# Altium PCB PCB1_7841_AIO.PcbDoc
Units mil, origin at the board's own origin, x right, y up, seen from the top; angles counter-clockwise.
Board outline 2795.28 x 2007.87 mil, 2 copper layers (Top Layer, Bottom Layer); 3 components, 33 nets, 149 pads, 0 vias.
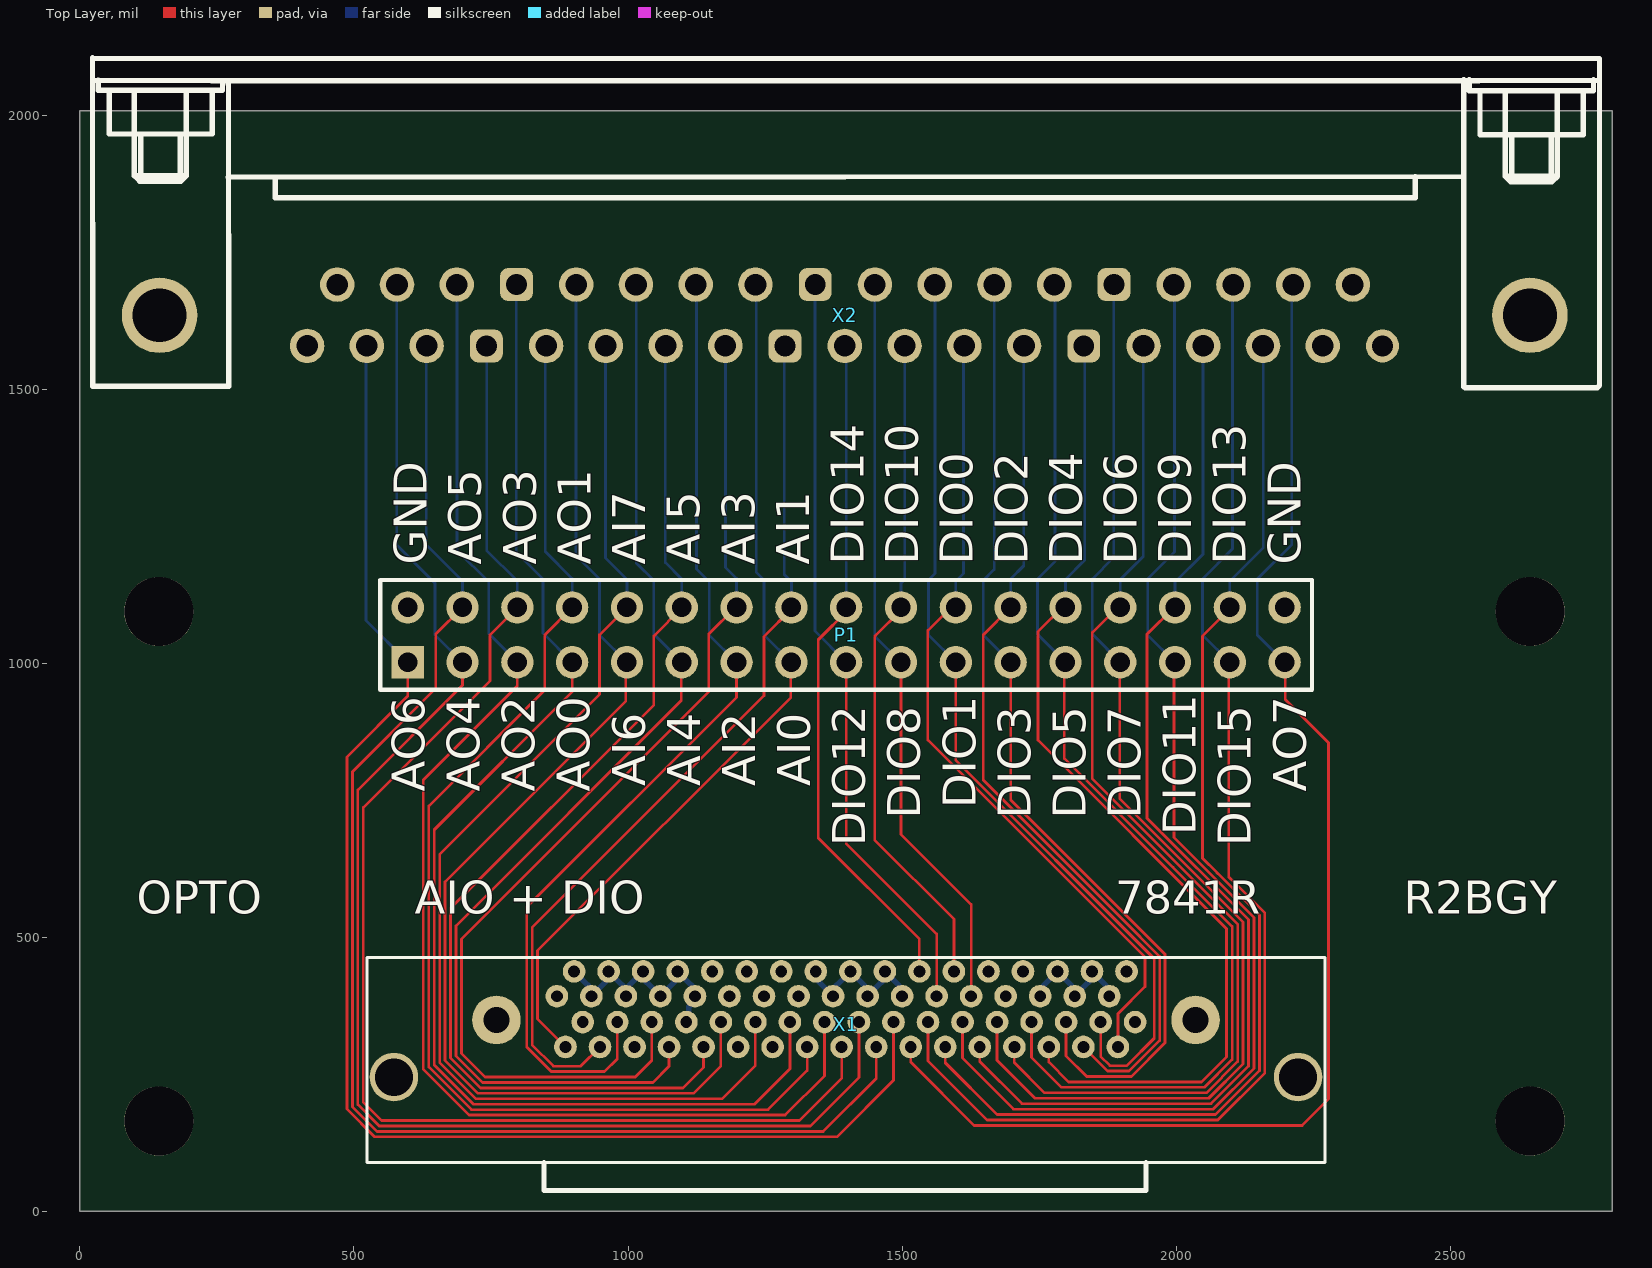
[diagram p0: Top Layer view]
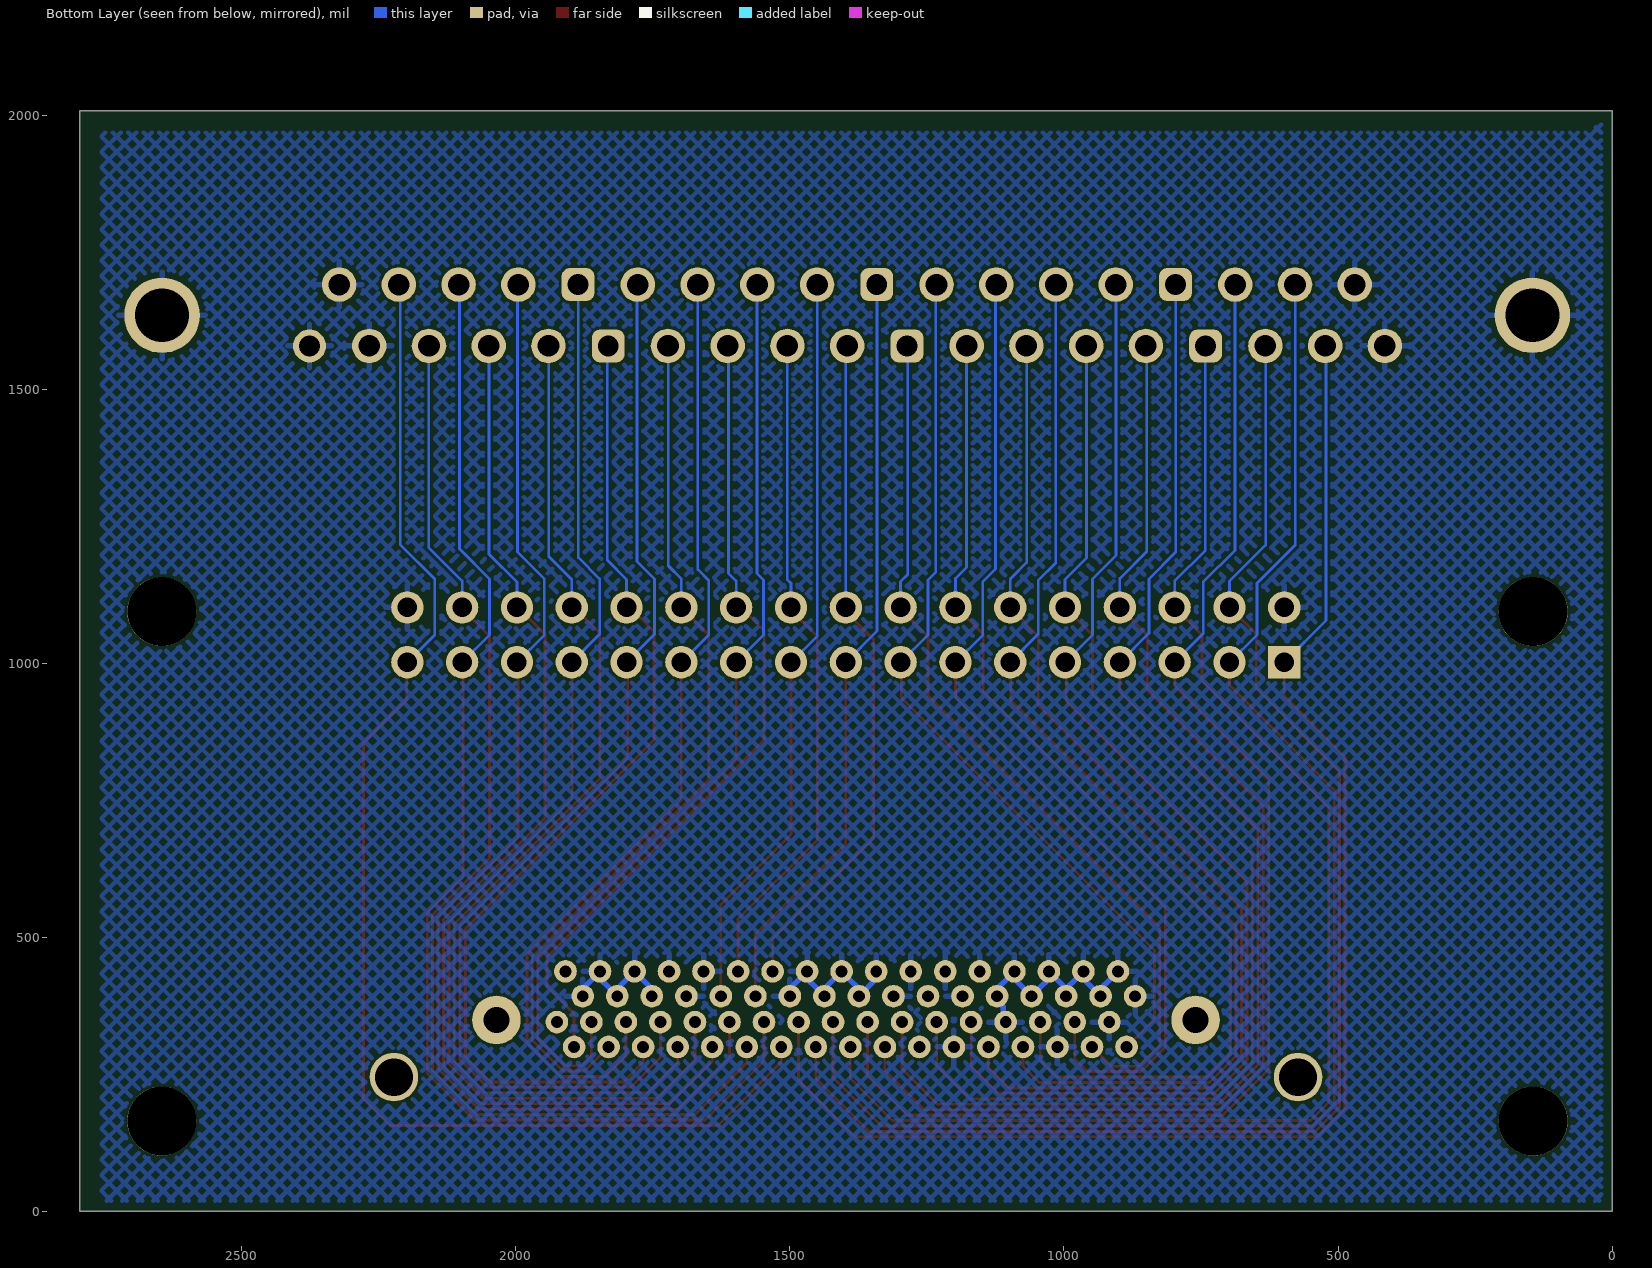
[diagram p1: Bottom Layer view, seen from below]

## Layer stack, top to bottom
Top Solder: solder mask 0.4, Solder Resist, Dk 3.5
Top Layer: signal copper 1.4
Dielectric 1: dielectric 12.6, FR-4, Dk 4.8
Bottom Layer: signal copper 1.4
Bottom Solder: solder mask 0.4, Solder Resist, Dk 3.5

## Board outline
0,0 0,2007.87 2795.28,2007.87 2795.28,0

## Design rules (kind name [scope] priority, off if disabled: settings)
Clearance [All] p1: gap=4.92 ignorepadtopadclearanceinfootprint=FALSE
PolygonConnect [All] p1: connectstyle=Relief reliefconductorwidth=10 reliefentries=4 polygonreliefangle="90 Angle" airgapwidth=10
RoutingVias [All] p1: holewidth=28 width=50 viastyle="Through Hole" minholewidth=28 minwidth=50 maxholewidth=28 maxwidth=50
SolderMaskExpansion [All] p1: expansion=4 istentingtop=FALSE
Width [All] p1: maxlimit=10 minlimit=4.92 preferedwidth=10
30 further rules are at their usual default settings.

## Components (designator, comment, footprint, x,y, rotation, side; value= is the part's Value field where it differs from the comment)
P1 "Header 17X2" HDR2X17 598,1002 r0 top
X1 "FPGA_connector" FPGA 572.83,245 r0 top
X2 "CHEAP_CON_37_MALE" CHEAP_CONN_MALE 2645.46,1635 r180 top

## Footprints (in the part's own frame and the unit in brackets; to place one, negate y for a bottom-side part, rotate by r counter-clockwise, add the part's x,y. Pads: shape width x height; smd on the part's side, far side on the other; paste and mask are expansions set on the pad)
CHEAP_CONN_MALE [mm] "CHEAP_CONN_MALE"
  round 1.524 hole 0.965: 1(6.833,1.422)
  round 1.6 hole 1: 2(9.601,1.422) 3(12.37,1.422) 4(15.138,1.422) 5(17.907,1.422) 7(23.444,1.422) 8(26.213,1.422) 9(28.981,1.422) 10(31.75,1.422) 12(37.287,1.422) 13(40.056,1.422) 14(42.824,1.422) 15(45.593,1.422) 17(51.13,1.422) 18(53.899,1.422) 19(56.667,1.422) 20(8.204,-1.422) 21(10.973,-1.422) 22(13.741,-1.422) 23(16.51,-1.422) 25(22.047,-1.422) 26(24.816,-1.422) 27(27.584,-1.422) 28(30.353,-1.422) 30(35.89,-1.422) 31(38.659,-1.422) 32(41.427,-1.422) 33(44.196,-1.422) 35(49.733,-1.422) 36(52.502,-1.422) 37(55.27,-1.422)
  rrect50% 1.524x1.524 hole 0.965: 6(20.676,1.422) 11(34.519,1.422) 16(48.362,1.422) 24(19.279,-1.422) 29(33.122,-1.422) 34(46.965,-1.422)
  round 3.5 hole 2.5: 38(63.5,0) 39(0,0)
  silkscreen extent -3.22,-11.92 66.61,3.36
FPGA [mm] "FPGA Connector"
  round 1.05 hole 0.55: 1(33.95,4.9) 2(33.15,3.75) 3(32.35,4.9) 4(31.55,3.75) 5(30.75,4.9) 6(29.95,3.75) 7(29.15,4.9) 8(28.35,3.75) 9(27.55,4.9) 10(26.75,3.75) 11(25.95,4.9) 12(25.15,3.75) 13(24.35,4.9) 14(23.55,3.75) 15(22.75,4.9) 16(21.95,3.75) 17(21.15,4.9) 18(20.35,3.75) 19(19.55,4.9) 20(18.75,3.75) 21(17.95,4.9) 22(17.15,3.75) 23(16.35,4.9) 24(15.55,3.75) 25(14.75,4.9) 26(13.95,3.75) 27(13.15,4.9) 28(12.35,3.75) 29(11.55,4.9) 30(10.75,3.75) 31(9.95,4.9) 32(9.15,3.75) 33(8.35,4.9) 34(7.55,3.75) 35(34.35,2.55) 36(33.55,1.4) 37(32.75,2.55) 38(31.95,1.4) 39(31.15,2.55) 40(30.35,1.4) 41(29.55,2.55) 42(28.75,1.4) 43(27.95,2.55) 44(27.15,1.4) 45(26.35,2.55) 46(25.55,1.4) 47(24.75,2.55) 48(23.95,1.4) 49(23.15,2.55) 50(22.35,1.4) 51(21.55,2.55) 52(20.75,1.4) 53(19.95,2.55) 54(19.15,1.4) 55(18.35,2.55) 56(17.55,1.4) 57(16.75,2.55) 58(15.95,1.4) 59(15.15,2.55) 60(14.35,1.4) 61(13.55,2.55) 62(12.75,1.4) 63(11.95,2.55) 64(11.15,1.4) 65(10.35,2.55) 66(9.55,1.4) 67(8.75,2.55) 68(7.95,1.4)
  round 2.25 hole 1.2: 69(37.15,2.65) 71(4.75,2.65)
  round 2.25 hole 1.75: 70(41.9,0) 72(0,0)
  silkscreen extent -1.25,-5.25 43.15,5.55
HDR2X17 [mm] "Connector; Header; 17x2 Position"
  rect 1.5x1.5 hole 0.9: 1(0,0)
  round 1.5 hole 0.9: 2(0,2.54) 3(2.54,0) 4(2.54,2.54) 5(5.08,0) 6(5.08,2.54) 7(7.62,0) 8(7.62,2.54) 9(10.16,0) 10(10.16,2.54) 11(12.7,0) 12(12.7,2.54) 13(15.24,0) 14(15.24,2.54) 15(17.78,0) 16(17.78,2.54) 17(20.32,0) 18(20.32,2.54) 19(22.86,0) 20(22.86,2.54) 21(25.4,0) 22(25.4,2.54) 23(27.94,0) 24(27.94,2.54) 25(30.48,0) 26(30.48,2.54) 27(33.02,0) 28(33.02,2.54) 29(35.56,0) 30(35.56,2.54) 31(38.1,0) 32(38.1,2.54) 33(40.64,0) 34(40.64,2.54)
  silkscreen extent -1.27,-1.27 41.91,3.81

## Part data
P1: "Header, 17-Pin, Dual row", LatestRevisionDate=17-Jul-2002, LatestRevisionNote="Re-released for DXP Platform.", Publisher="Altium Limited"
X1: library part FPGA_Connector

## Free pads (board coordinates)
  round 125.98 hole 125.98 unplated: 0(144,164.91) 0(144,1094.24) 0(2645.97,164.91) 0(2645.97,1094.24)

## Nets (pads, with @x,y where several pads share a name; then routed paths per layer and width w, separated by ;. In a path a pad name is that pad's centre, name@x,y a point inside that pad or via, vN(x,y) a via of type N, cw(c..) or ccw(c..) an arc to the next point about the centre after c; other vN are vias at no path point)
AI0: P1.15 X1.68 X2.30 | length 1629.8
  Top Layer w5: X1.68 835,350.94 835,476 1297,938 P1.15@1297,1002
  Bottom Layer w5: X2.30@1234,1691 1234,1166 1248,1152 1248,1052 P1.15
AI1: P1.16 X1.66 X2.11 | length 1629.9
  Top Layer w5: X1.66 913.7,265 864,265 825.08,303.92 825.08,518.08 1248,941 1248,1049 P1.16@1299.5,1100.5
  Bottom Layer w5: X2.11@1285,1579 1285,1162.01 1298,1149.01 P1.16
AI2: P1.13 X1.65 X2.31 | length 1840.4
  Top Layer w5: X1.65 980.31,278.31 957.08,255.08 859.89,255.08 815.16,299.81 815.16,555.16 1198,938 P1.13
  Bottom Layer w5: X2.31@1125,1691 1125,1172 1148,1149 1148,1052 P1.13
AI3: P1.14 X1.63 X2.12 | length 1955.4
  Top Layer w5: X1.63 1043.31,275.31 1013.16,245.16 738.84,245.16 696,288 696,497 1147,948 1147,1053 P1.14@1197,1103
  Bottom Layer w5: X2.12@1178,1579 1178,1175 1198,1155 P1.14
AI4: P1.11 X1.62 X2.32 | length 2068.1
  Top Layer w5: X1.62 1074.8,264.8 1045.24,235.24 734.73,235.24 686.08,283.89 686.08,521.08 1097,932 P1.11@1097,1002
  Bottom Layer w5: X2.32@1015,1691 1015,1183 1047,1151 1047,1053 P1.11
AI5: P1.12 X1.60 X2.13 | length 2023.1
  Top Layer w5: P1.12@1098.5,1101.5 1047,1050 1047,924 676.16,553.16 676.16,279.78 730.62,225.31 1100.31,225.31 1137.8,262.8 X1.60
  Bottom Layer w5: X2.13@1068,1579 1068,1184 1098,1154 P1.12
AI6: P1.9 X1.59 X2.33 | length 2219.2
  Top Layer w5: P1.9@996,1002 996,931 666.24,601.24 666.24,275.67 726.51,215.39 1119.39,215.39 1169.29,265.29 X1.59
  Bottom Layer w5: X2.33@905,1691 905,1197 948,1154 948,1052 P1.9
AI7: P1.10 X1.57 X2.14 | length 2172.8
  Top Layer w5: P1.10 948,1052 948,943 656.31,651.31 656.31,271.56 722.4,205.47 1171.47,205.47 1232.28,266.28 X1.57
  Bottom Layer w5: X2.14@959,1579 959,1192 998,1153 P1.10
AO0: P1.7 X1.55 X2.34 | length 2360.6
  Top Layer w5: P1.7 898,948 646.39,696.39 646.39,267.45 718.3,195.55 1230.55,195.55 1295.28,260.28 X1.55
  Bottom Layer w5: X2.34@796,1691 796,1203 845,1154 845,1055 P1.7
AO1: P1.8 X1.54 X2.15 | length 2239.6
  Top Layer w5: P1.8 848,1052 848,951 636.47,739.47 636.47,263.34 714.19,185.63 1255.63,185.63 1326.77,256.77 X1.54
  Bottom Layer w5: X2.15@849,1579 849,1204 898,1155 P1.8
AO2: P1.5 X1.53 X2.35 | length 2444.7
  Top Layer w5: P1.5@798,1004.23 P1.5 798,959 626.55,787.55 626.55,259.23 710.08,175.71 1286.71,175.71 1358.27,247.27 X1.53
  Bottom Layer w5: X2.35@688,1691 688,1206 746,1148 746,1054 P1.5
AO3: P1.6 X1.52 X2.16 | length 2495.4
  Top Layer w5: P1.6 748,1052 748,968 517,737 517,199 550.21,165.79 1312.79,165.79 1389.76,242.76 X1.52
  Bottom Layer w5: X2.16@742,1579 742,1206 798,1150 P1.6
AO4: P1.3 X1.51 X2.36 | length 2694.4
  Top Layer w5: P1.3@698,1003.38 P1.3 698,960 507.08,769.08 507.08,194.89 546.1,155.87 1332.87,155.87 1421.26,244.26 X1.51
  Bottom Layer w5: X2.36@578,1691 578,1216 648,1146 648,1052 P1.3
AO5: P1.4 X1.50 X2.17 | length 2570.4
  Top Layer w5: P1.4 649,1053 649,954 497.16,802.16 497.16,190.78 541.99,145.94 1355.94,145.94 1452.76,242.76 X1.50
  Bottom Layer w5: X2.17@632,1579 632,1216 698,1150 P1.4
AO6: P1.1 X1.49 X2.18 | length 2636.6
  Top Layer w5: P1.1 598,940 487.24,829.24 487.24,186.67 537.88,136.02 1381.02,136.02 1484.25,239.25 X1.49
  Bottom Layer w5: X2.18@522,1579 522,1078 P1.1
AO7: P1.33 X1.48 X2.21 | length 2423.8
  Top Layer w5: X1.48 1515.75,272.25 1631.13,156.87 2229.87,156.87 2278,205 2278,855 2199,934 2199,1001 P1.33
  Bottom Layer w5: P1.33 2148,1052 2148,1154 2211,1217 X2.21@2211,1691
DIO0: P1.22 X1.36 X2.8 | length 1492.9
  Top Layer w5: P1.22@1593.5,1106.5 1547,1060 1547,860.01 1943,464.01 1943,410 1893.7,360.7 X1.36
  Bottom Layer w5: P1.22 1598,1150 1612,1164 X2.8@1612,1579
DIO1: P1.21 X1.37 X2.27 | length 1738.7
  Top Layer w5: P1.21 1598,823.04 1960,461.04 1960,316 1910,266 1879,266 1862.2,282.8 X1.37
  Bottom Layer w5: X2.27@1560,1691 1560,1164 1548,1152 1548,1052 P1.21
DIO2: P1.24 X1.38 X2.7 | length 1611.7
  Top Layer w5: P1.24 1648,1052 1648,787.07 1901.04,534.04 1969.92,465.15 1969.92,311.89 1914.11,256.08 1874.75,256.08 X1.38
  Bottom Layer w5: P1.24 1698,1154 1722,1178 X2.7@1722,1579
DIO3: P1.23 X1.39 X2.26 | length 1812.3
  Top Layer w5: P1.23 1698,751.1 1979.84,469.26 1979.84,307.78 1918.22,246.16 1836.84,246.16 1799.21,283.79 X1.39
  Bottom Layer w5: X2.26@1668,1691 1668,1171 1648,1151 1648,1052 P1.23
DIO4: P1.26 X1.40 X2.6 | length 1862.5
  Top Layer w5: X1.40 1767.72,272.28 1803.76,236.24 2046.24,236.24 2092,282 2092,515.72 1748,859.72 1748,1058 P1.26@1795,1105
  Bottom Layer w5: P1.26 1798,1153 1833,1188 X2.6@1833,1579
DIO5: P1.25 X1.41 X2.25 | length 2049.2
  Top Layer w5: X1.41 1736.22,280.78 1790.69,226.31 2051.22,226.31 2102.24,277.33 2102.24,519.96 1994.6,627.6 1796,826.19 P1.25@1796,1002
  Bottom Layer w5: X2.25@1779,1691 1779,1186 1747,1154 1747,1053 P1.25
DIO6: P1.28 X1.42 X2.5 | length 1938.1
  Top Layer w5: X1.42 1704.72,271.28 1759.61,216.39 2055.33,216.39 2112.16,273.22 2112.16,524.07 1847,789.22 1847,1056 P1.28@1895.5,1104.5
  Bottom Layer w5: P1.28 1898,1153 1940,1195 X2.5@1940,1579
DIO7: P1.27 X1.43 X2.24 | length 2125.5
  Top Layer w5: X1.43 1673.23,275.77 1742.53,206.47 2059.44,206.47 2122.08,269.11 2122.08,528.18 1897,753.26 P1.27@1897,1002
  Bottom Layer w5: X2.24@1886,1691 1886,1193 1847,1154 1847,1053 P1.27
DIO8: P1.19 X1.10 X2.28 | length 1384
  Top Layer w5: P1.19@1498,1014.79 P1.19 1498,688 1625.98,560.02 X1.10
  Bottom Layer w5: X2.28@1450,1691 1450,1050 P1.19
DIO9: P1.30 X1.44 X2.4 | length 2010.7
  Top Layer w5: X1.44 1641.73,273.27 1718.45,196.55 2063.55,196.55 2132,265 2132,532.29 1947,717.29 1947,1053 P1.30@1997,1103
  Bottom Layer w5: P1.30 1998,1148 2049,1199 X2.4@2049,1579
DIO10: P1.20 X1.11 X2.9 | length 1222.3
  Top Layer w5: P1.20@1500.5,1099.5 1450,1049 1450,678 1594.49,533.51 X1.11
  Bottom Layer w5: P1.20 1498,1146 1505,1153 X2.9@1505,1579
DIO11: P1.29 X1.45 X2.23 | length 2198.2
  Top Layer w5: X1.45 1610.24,279.76 1703.37,186.63 2067.66,186.63 2141.92,260.89 2141.92,536.4 1996,682.32 P1.29@1996,1002
  Bottom Layer w5: X2.23@1997,1691 1997,1203 1948,1154 1948,1052 P1.29
DIO12: P1.17 X1.12 X2.29 | length 1390.3
  Top Layer w5: P1.17 1398,671 1562.99,506.01 X1.12
  Bottom Layer w5: X2.29@1341,1691 1341,1059 P1.17
DIO13: P1.32 X1.46 X2.3 | length 2084.9
  Top Layer w5: X1.46 1578.74,271.26 1673.29,176.71 2071.77,176.71 2151.84,256.78 2151.84,540.51 2075.98,616.37 2074.19,618.16 2048,644.35 2048,1050 P1.32@2099,1101
  Bottom Layer w5: P1.32 2098,1150 2159,1211 X2.3@2159,1579
DIO14: P1.18 X1.13 X2.10 | length 1236.3
  Top Layer w5: P1.18@1402,1098 1347,1043 1347,681.5 1531.5,497 X1.13
  Bottom Layer w5: P1.18 X2.10@1398,1579
DIO15: P1.31 X1.47 X2.22 | length 2274.5
  Top Layer w5: X1.47 1547.24,274.76 1655.21,166.79 2075.88,166.79 2161.76,252.67 2161.76,544.61 2107.38,599 2096,610.38 P1.31@2096,1002
  Bottom Layer w5: P1.31 2048,1052 2048,1154 2103,1209 X2.22@2103,1691
GND: P1.2 P1.34 X1.2 X1.3 X1.4 X1.5 X1.6 X1.7 X1.8 X1.9 X1.14 X1.15 X1.16 X1.17 X1.18 X1.19 X1.20 X1.21 X1.23 X1.24 X1.25 X1.26 X1.27 X1.28 X1.29 X1.30 X1.31 X1.32 X1.33 X1.34 X1.58 X1.61 X1.64 X1.67 X2.1 X2.2 X2.19 X2.20 X2.37 X2.38 X2.39 | length 986.9
  Bottom Layer w10: X1.33 927.07,412.41 927.07,398.63 X1.32 958.57,418.14 958.57,431.92 X1.31 990.07,412.41 990.07,398.63 X1.30 1002.06,398.63 1002.06,412.41 X1.29 1033.56,431.92 1033.56,418.14 X1.28 1084.55,418.14 1084.55,431.92 X1.27 1116.05,412.41 1116.05,398.63 X1.26 1122.05,384.16 1111.03,373.14 1111.03,350.12 X1.61 ; X1.19 1348.52,431.92 1348.52,418.14 X1.18 1380.01,398.63 1380.01,412.41 X1.17 1431.01,412.41 1431.01,398.63 X1.16 1462.51,418.14 1462.51,431.92 X1.15 1494,412.41 1494,398.63 X1.14 ; X1.6 1757.96,398.63 1757.96,412.41 X1.5 1808.96,412.41 1808.96,398.63 X1.4 1840.46,418.14 1840.46,431.92 X1.3 1871.96,412.41 1871.96,398.63 X1.2
pads on no net: X1.1 X1.22 X1.35 X1.56 X1.69 X1.70 X1.71 X1.72

## Polygon pours and split planes (outlines as drawn)
GND on Bottom Layer "Top Overlay-No Net" (hatched 45Degree grid 20 track 8, remove dead copper, pour order 0): 19.68,1988.19 39.37,1968.5 2755.91,1968.5 2755.91,19.68 19.68,19.68

## Silkscreen, mask and mechanical layers (free items; w line width, h text height)
Top Overlay:
  text "GND" at 632.99,1180.04 h60 r90
  text "AO5" at 732.62,1180.04 h60 r90
  text "AO3" at 832.24,1180.04 h60 r90
  text "AO1" at 931.87,1180.04 h60 r90
  text "AI7" at 1031.49,1180.04 h60 r90
  text "AI5" at 1131.12,1180.04 h60 r90
  text "AI3" at 1230.74,1180.04 h60 r90
  text "AI1" at 1330.37,1180.04 h60 r90
  text "DIO14" at 1429.99,1180.04 h60 r90
  text "DIO10" at 1529.62,1180.04 h60 r90
  text "DIO0" at 1629.24,1180.04 h60 r90
  text "DIO2" at 1728.87,1180.04 h60 r90
  text "DIO4" at 1828.49,1180.04 h60 r90
  text "DIO6" at 1928.12,1180.04 h60 r90
  text "DIO9" at 2027.74,1180.04 h60 r90
  text "DIO13" at 2127.37,1180.04 h60 r90
  text "GND" at 2226.99,1180.04 h60 r90
  text "AI6" at 1030.99,776.01 h60 r90
  text "AI4" at 1131.49,776.01 h60 r90
  text "AI2" at 1231.99,776.01 h60 r90
  text "AI0" at 1332.49,776.01 h60 r90
  text "AO6" at 628.99,766.01 h60 r90
  text "AO4" at 729.49,766.01 h60 r90
  text "AO2" at 829.99,766.01 h60 r90
  text "AO0" at 930.49,766.01 h60 r90
  text "AO7" at 2236.99,766.01 h60 r90
  text "DIO1" at 1633.99,736.02 h60 r90
  text "DIO8" at 1533.49,716.03 h60 r90
  text "DIO3" at 1734.49,716.03 h60 r90
  text "DIO5" at 1834.99,716.03 h60 r90
  text "DIO7" at 1935.49,716.03 h60 r90
  text "DIO11" at 2035.99,686.04 h60 r90
  text "DIO12" at 1432.99,666.04 h60 r90
  text "DIO15" at 2136.49,666.04 h60 r90
  text "OPTO" at 104.04,543.01 h60
  text "AIO + DIO" at 611.08,543.01 h60
  text "7841R" at 1889.04,543.01 h60
  text "R2BGY" at 2415.05,543.01 h60
Mechanical 1:
  the board outline again, w10